# Altium PCB SSFocuser-C-DRV8825.PcbDoc
Units mil, origin at the board's own origin, x right, y up, seen from the top; angles counter-clockwise.
Board outline 3068 x 1575 mil, 2 copper layers (Top Layer, Bottom Layer); 70 components, 74 nets, 311 pads, 240 vias.
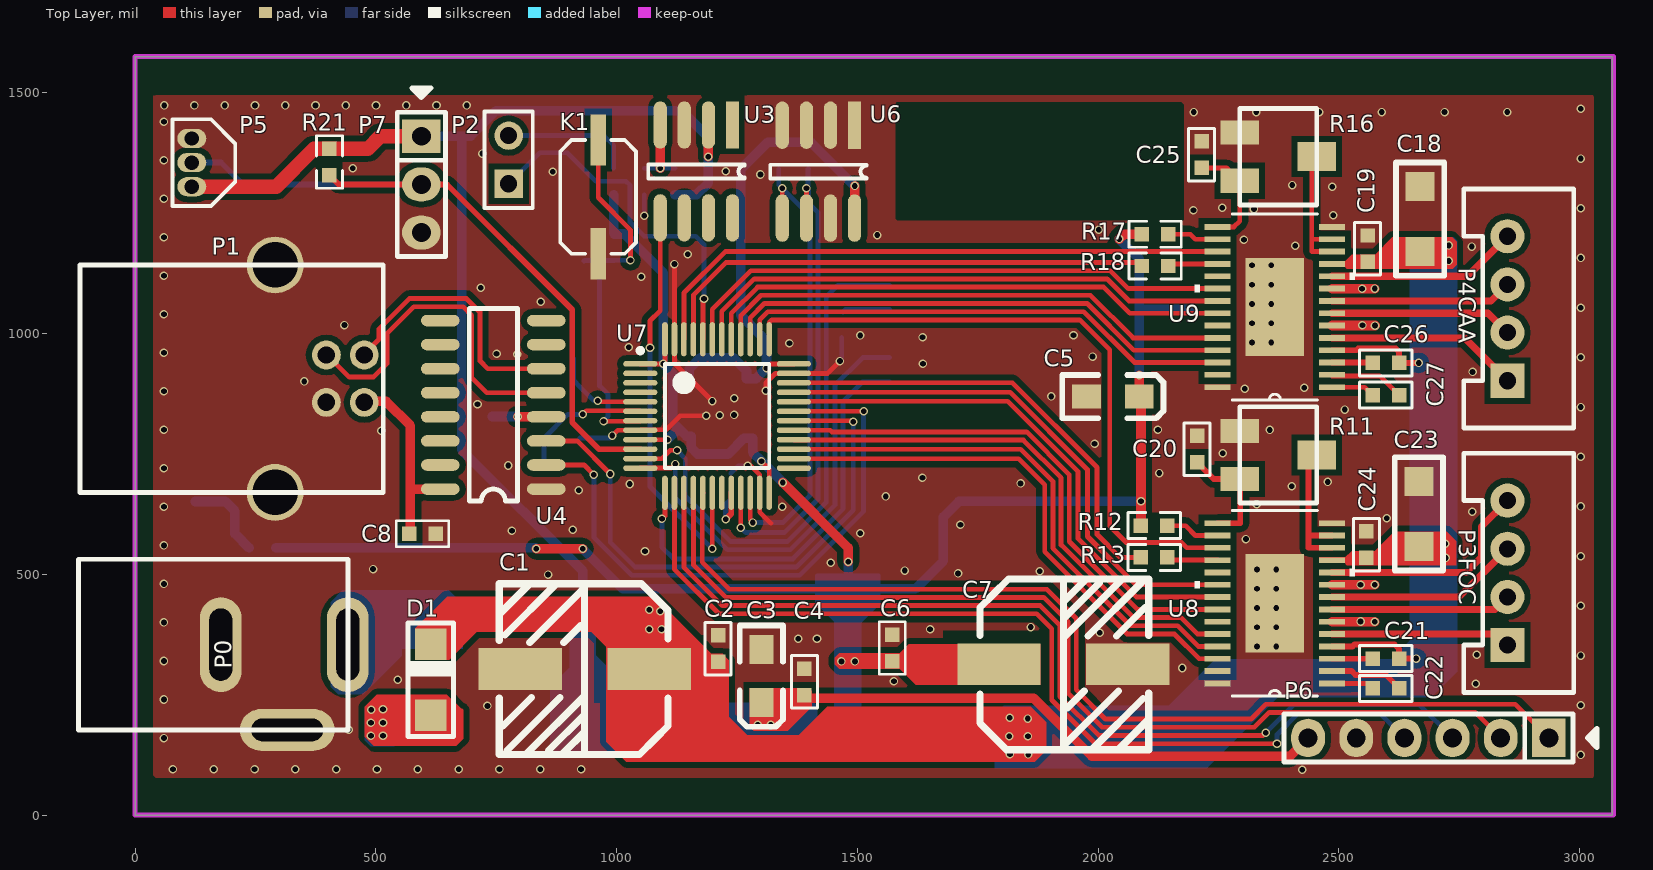
[diagram p0: Top Layer view]
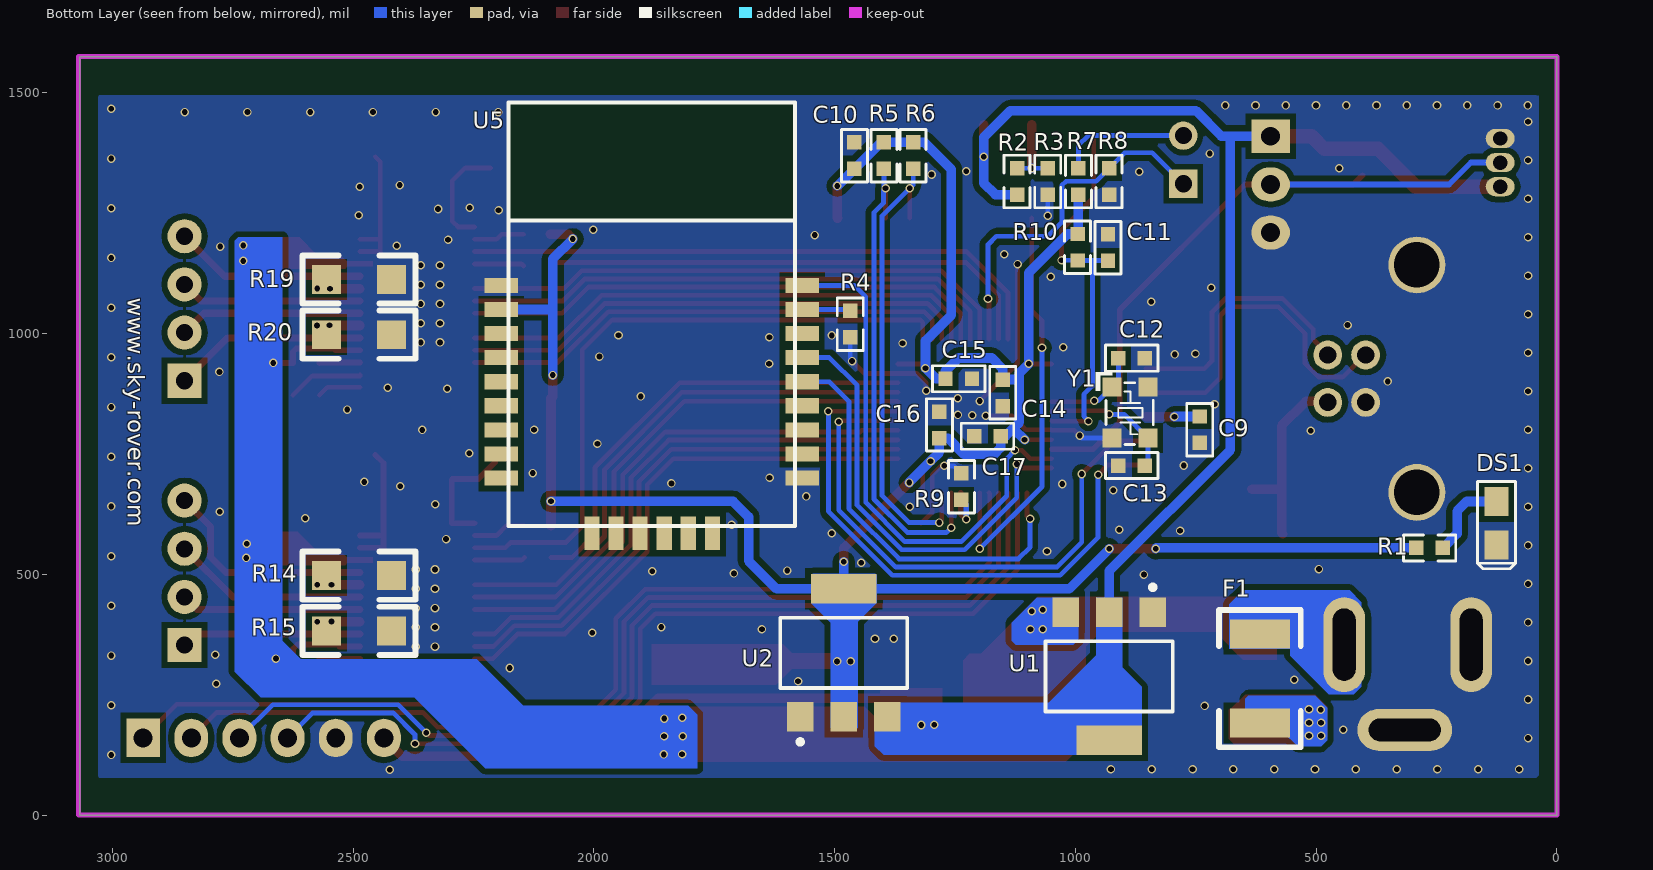
[diagram p1: Bottom Layer view, seen from below]

## Layer stack, top to bottom
Top Solder: solder mask 0.4, Solder Resist, Dk 3.5
Top Layer: signal copper 1.4
Dielectric1: dielectric 12.6, FR-4, Dk 4.8
Bottom Layer: signal copper 1.4
Bottom Solder: solder mask 0.4, Solder Resist, Dk 3.5

## Board outline
0,0 0,1575 3068,1575 3068,0

## Design rules (kind name [scope] priority, off if disabled: settings)
Clearance Clearance_pyog [InPolygon] p1: gap=12
Clearance Clearance_mcu [InComponentClass('U7')] p2: gap=7
Clearance [All] p3: gap=7
HoleSize [All] p1: absolutevalues=TRUE maxlimit=1000 minlimit=1 maxpercent=80.000 minpercent=20.000
MinimumSolderMaskSliver [All] p1: minsoldermaskwidth=0
PolygonConnect [All] p1: connectstyle=Direct reliefconductorwidth=10 reliefentries=4 polygonreliefangle="90 Angle" airgapwidth=10
RoutingVias [All] p1: holewidth=28 width=50 viastyle="Through Hole" minholewidth=11.81 minwidth=17.72 maxholewidth=28 maxwidth=50
SilkToSilkClearance [All] p1: silktosilkclearance=0
SilkToSolderMaskClearance [IsPad] p1: minsilkscreentomaskgap=0 clearancetoexposedcopper=TRUE
SolderMaskExpansion [All] p1: expansion=4
Width [All] p1: maxlimit=50 minlimit=10 preferedwidth=10
25 further rules are at their usual default settings.

## Components (designator, comment, footprint, x,y, rotation, side; value= is the part's Value field where it differs from the comment)
C1 "470uF" 16V/470U(CD10X10D5) 933.68,303.18 r180 top locked
C2 "100nF" 0603C 1211,373 r270 top locked
C3 "10uF" 3216 1300.72,233.54 r270 top locked
C4 "100nF" 0603C 1390,304 r270 top locked
C5 "10uF" 3216 2085.53,868.99 r0 top locked
C6 "100nF" 0603C 1572.6,374.51 r270 top locked
C7 "1000uF" 16V/470U(CD10X10D5) 1928,313 r0 top locked
C8 "100nF" 0603C 624.58,584.24 r180 top
C9 "100nF" 0603C 741.85,772.75 r90 bottom locked
C10 "100nF" 0603C 1459,1397 r270 bottom locked
C11 "100nF" 0603C 932.4,1205.8 r270 bottom locked
C12 "20pF" 0603C 910.66,948.79 r180 bottom locked
C13 "20pF" 0603C 855.66,725.6 r0 bottom locked
C14 "100nF" 0603C 1151,849.42 r90 bottom locked
C15 "100nF" 0603C 1214.8,906.18 r0 bottom locked
C16 "100nF" 0603C 1282.7,837.67 r270 bottom locked
C17 "100nF" 0603C 1210.12,786.77 r180 bottom locked
C18 "4.7uF" 1206C 2668.73,1170.02 r90 top locked
C19 "100nF" 0603C 2559.81,1148.62 r90 top locked
C20 "0.47uF" 0603C 2205.52,787.53 r270 top locked
C21 "100nF" 0603C 2625,325 r180 top locked
C22 "10nF" 0603C 2625,263 r180 top locked
C23 "4.7uF" 1206C 2666,558 r90 top locked
C24 "100nF" 0603C 2557,534 r90 top locked
C25 "0.47uF" 0603C 2215,1399 r270 top locked
C26 "100nF" 0603C 2625,939 r180 top locked
C27 "10nF" 0603C 2625,872 r180 top locked
D1 "M7" DO-214AC 614,281 r90 top locked
DS1 "LED1" 0805D 125.4,606.21 r270 bottom locked
F1 "MSMD350-6V 2A" 1812R 617,191 r90 bottom locked
K1 "Key" SW-4*6 1040.59,1401.9 r270 top locked
P0 "SOURCE" DC_5.5MM -117.06,531.17 r0 top locked
P1 "USB-B" USB-B 476.04,857.01 r0 top locked
P2 "BOOT0" HDR1X2 776,1311 r90 top locked
P3FOC "Header 4" XH_4_V 2850,353 r90 top locked
P4CAA "Header 4" XH_4_V 2850,902 r90 top locked
P5 "DS18B20" TO-92B 118,1305 r90 top
P6 "HDR1x6" PIN-6-2.54-1.0 2686.08,160.17 r180 top locked
P7 "HDR1x3" PIN-3-2.54-1.0 594.58,1309.68 r270 top locked
R1 "102" 0603R 237.11,554.82 r0 bottom
R2 "4.7K" 0603R 1121.29,1343.29 r270 bottom locked
R3 "2K" 0603R 1057.56,1343.29 r270 bottom locked
R4 "10K" 0603R 1467.73,1047.1 r270 bottom locked
R5 "4.7k" 0603R 1397.87,1342.08 r90 bottom locked
R6 "4.7k" 0603R 1337,1342 r90 bottom locked
R7 "5K" 0603R 993.83,1288.29 r90 bottom locked
R8 "10K" 0603R 930.1,1343.29 r270 bottom locked
R9 "10K" 0603R 1236.98,709.56 r270 bottom locked
R10 "10K" 0603R 995.35,1151.73 r90 bottom locked
R11 "RPot" VR_SMD 2374,748 r270 top locked
R12 "1.5K" 0603R 2089,601 r0 top locked
R13 "1.5K" 0603R 2089,535.18 r0 top locked
R14 "0.1Ω" 1206R 2420.42,497.12 r0 bottom locked
R15 "0.1Ω" 1206R 2420.42,382.66 r0 bottom locked
R16 "RPot" VR_SMD 2374,1367.25 r270 top locked
R17 "1.5K" 0603R 2090.78,1206.11 r0 top locked
R18 "1.5K" 0603R 2090.78,1140.25 r0 top locked
R19 "0.1Ω" 1206R 2420.31,1112.11 r0 bottom locked
R20 "0.1Ω" 1206R 2420.31,997.55 r0 bottom locked
R21 "4.7K" 0603R 403.8,1328.78 r90 top locked
U1 "AMS1117-5.0" SOT223 930,288 r0 bottom locked
U2 "AMS1117-3.3" SOT223 1481,337 r180 bottom locked
U3 "MAX813LCSA" SOP-8 1240.73,1433.05 r270 top locked
U4 "CH340G" SO-16 854,677 r180 top locked
U5 "B-0006" B-0006 1880,1040 r180 bottom locked
U6 "AT24C02BN-SH-T" SOP-8 1494.25,1432.68 r270 top locked
U7 "STM32F103C8T6" LQFP48_N 1208.72,828.74 r270 top locked
U8 "DRV8825" HTSSOP 2367,439.84 r180 top locked
U9 "DRV8825" HTSSOP 2367,1054.98 r180 top locked
Y1 "8MHz" X3225 925.35,887.89 r270 bottom locked

## Footprints (in the part's own frame and the unit in brackets; to place one, negate y for a bottom-side part, rotate by r counter-clockwise, add the part's x,y. Pads: shape width x height; smd on the part's side, far side on the other; paste and mask are expansions set on the pad)
16V/470U(CD10X10D5) [mm] "取自《FE-3AD》"
  rect 4.4x2.2 smd: 1(-3.4,0) 2(3.4,0)
  Top Layer pour cut-out: -6.35,1.778 -0.508,1.778 -0.508,-1.778 -6.35,-1.778
  silkscreen extent -4.4,-4.5 4.5,4.5
0603C [mil]
  rect 30x30 smd: 1(0,0) 2(55,0)
  silkscreen extent -27,-27 82,27, body extent -4,-16 58,16, height 12
0603R [mil]
  rect 30x30 smd: 1(0,0) 2(55,0)
  silkscreen extent -27,-27 82,27, body extent -4,-18 58,16, height 18
0805D [mil]
  rect 60x50 smd: 1(-45,0) 2(45,0)
  silkscreen extent -87,-39 95,39, body extent -63,-32 63,30, height 42
1206C [mil]
  rect 60x60 smd: 1(0,0) 2(135,0)
  silkscreen extent -50,-50 185,50, body extent 6,-33 132,29, height 40
1206R [mil]
  rect 60x60 smd: 1(0,0) 2(135,0)
  silkscreen extent -50,-50 185,50, body extent 5,-32 131,30, height 22
1812R [mil]
  rect 60x125 smd: 1(0,0) 2(185,0)
  silkscreen extent -50,-85 235,85, body extent 4,-63 182,63, height 64
3216 [mil]
  rect 60x50 smd: 1(0,0) 2(-110,0)
  silkscreen extent -160,-45 50,45, body extent -151,-35 38,36, height 73
B-0006 [mil]
  rect 70x31.5 smd: 1(-312.5,60) 2(-312.5,10) 3(-312.5,-40) 4(-312.5,-90) 5(-312.5,-140) 6(-312.5,-190) 7(-312.5,-240) 8(-312.5,-290) 9(-312.5,-340) 16(312.5,-340) 17(312.5,-290) 18(312.5,-240) 19(312.5,-190) 20(312.5,-140) 21(312.5,-90) 22(312.5,-40) 23(312.5,10) 24(312.5,60)
  rect 31.5x70 smd: 10(-124.04,-455) 11(-74.04,-455) 12(-24.04,-455) 13(25.96,-455) 14(75.96,-455) 15(125.96,-455)
  Top Layer pour cut-out: -298,439 -298,195 297,195 298,196 298,439
  silkscreen extent -298,-440 298,440
DC_5.5MM [mm]
  oval 2.2x5 hole 1.2 slot 3.8 at 90 deg: 1(14.2,-4.5) 2(7.5,-4.5)
  oval 5x2.2 hole 1.2 slot 3.8 at 0 deg: 3(11,-9)
  silkscreen extent 0,-9 14.2,0, body extent -0.1,-8.88 14.1,-0.12, height 10.82
DO-214AC [mm]
  rect 1.655x1.67 smd: 1(1.865,0) 2(-1.865,0)
  silkscreen extent -3,-1.2 3,1.2, body extent -2.74,-1.4 2.74,1.4, height 2.3
HDR1X2 [mm] "Connector; Header; 2 Position"
  rect 1.5x1.5 hole 0.9: 1(0,0)
  round 1.5 hole 0.9: 2(2.54,0)
  silkscreen extent -1.27,-1.27 3.81,1.27, body extent -1.27,-1.27 3.81,1.27, height 7.58
HTSSOP [mil]
  rect 54x12 smd: 1(-119,166.34) 2(-119,140.75) 3(-119,115.16) 4(-119,89.57) 5(-119,63.98) 6(-119,38.39) 7(-119,12.8) 8(-119,-12.8) 9(-119,-38.39) 10(-119,-63.98) 11(-119,-89.57) 12(-119,-115.16) 13(-119,-140.75) 14(-119,-166.34) 15(119,-166.34) 16(119,-140.75) 17(119,-115.16) 18(119,-89.57) 19(119,-63.98) 20(119,-38.39) 21(119,-12.8) 22(119,12.8) 23(119,38.39) 24(119,63.98) 25(119,89.57) 26(119,115.16) 27(119,140.75) 28(119,166.34)
  rect 122.05x203.94 smd: 29(0,0)
  silkscreen extent -166,-193 166,193, body extent -133,-191 120,191, height 40
LQFP48_N [mm]
  oval 0.3x1.8 smd: 1(-2.75,-4.05) 2(-2.25,-4.05) 3(-1.75,-4.05) 4(-1.25,-4.05) 5(-0.75,-4.05) 6(-0.25,-4.05) 7(0.25,-4.05) 8(0.75,-4.05) 9(1.25,-4.05) 10(1.75,-4.05) 11(2.25,-4.05) 12(2.75,-4.05) 25(2.75,4.05) 26(2.25,4.05) 27(1.75,4.05) 28(1.25,4.05) 29(0.75,4.05) 30(0.25,4.05) 31(-0.25,4.05) 32(-0.75,4.05) 33(-1.25,4.05) 34(-1.75,4.05) 35(-2.25,4.05) 36(-2.75,4.05)
  oval 1.8x0.3 smd: 13(4.05,-2.75) 14(4.05,-2.25) 15(4.05,-1.75) 16(4.05,-1.25) 17(4.05,-0.75) 18(4.05,-0.25) 19(4.05,0.25) 20(4.05,0.75) 21(4.05,1.25) 22(4.05,1.75) 23(4.05,2.25) 24(4.05,2.75) 37(-4.05,2.75) 38(-4.05,2.25) 39(-4.05,1.75) 40(-4.05,1.25) 41(-4.05,0.75) 42(-4.05,0.25) 43(-4.05,-0.25) 44(-4.05,-0.75) 45(-4.05,-1.25) 46(-4.05,-1.75) 47(-4.05,-2.25) 48(-4.05,-2.75)
  silkscreen extent -3.57,-4.17 2.75,2.75, body extent -4.5,-4.5 4.5,4.5, height 1.5
PIN-3-2.54-1.0 [mil] "Pin Header"
  rect 70x80 hole 39.37: 1(-100,0)
  oval 70x80 hole 39.37: 2(0,0) 3(100,0)
  silkscreen extent -200,-50 150,50, body extent -150,-50 150,50, height 398
PIN-6-2.54-1.0 [mil] "Pin Header"
  rect 70x80 hole 39.37: 1(-250,0)
  oval 70x80 hole 39.37: 2(-150,0) 3(-50,0) 4(50,0) 5(150,0) 6(250,0)
  silkscreen extent -350,-50 300,50, body extent -300,-50 300,50, height 398
SO-16 [mil]
  oval 80x24 smd: 1(0,0) 2(0,-50) 3(0,-100) 4(0,-150) 5(0,-200) 6(0,-250) 7(0,-300) 8(0,-350) 9(220,-350) 10(220,-300) 11(220,-250) 12(220,-200) 13(220,-150) 14(220,-100) 15(220,-50) 16(220,0)
  silkscreen extent 60,-375 160,25, body extent -12,-377 226,29, height 77
SOP-8 [mm]
  rect 2.5x0.7 smd: 1(0,0)
  oval 2.5x0.7 smd: 2(0,-1.27) 3(0,-2.54) 4(0,-3.81) 5(4.9,-3.81) 6(4.9,-2.54) 7(4.9,-1.27) 8(4.9,0)
  silkscreen extent 2.08,-4.44 2.82,0.64, body extent -0.56,-4.44 5.48,0.58, height 1.6
SOT223 [mm] "SOT-223/SC-73; 4 Leads; Body 6.7 x 7.3 mm, inc. leads (LxW max)"
  rect 1.4x1.55 smd: 1(-2.3,-3.375) 2(0,-3.375) 3(2.3,-3.375)
  rect 3.45x1.55 smd: 4(0,3.375)
  silkscreen extent -3.35,-4.82 3.35,1.85, body extent -3.25,-3.53 3.25,3.43, height 1.7
SW-4*6 [mm] "SWITCH"
  rect 2.7x0.8 smd: 1(0,-2) 2(6,-2)
  silkscreen extent 0,-4 6,0
TO-92B [mil]
  oval 40x60 hole 30: 1(0,0) 2(50,0) 3(100,0)
  silkscreen extent -40,-90 140,40
USB-B [mm]
  round 1.524 hole 0.92: 1(0,0) 2(0,2.5) 3(-2,2.5) 4(-2,0)
  round 3 hole 2.4: 5(-4.7,7.25) 6(-4.7,-4.75)
  silkscreen extent -15,-4.75 1,7.25
VR_SMD [mil]
  rect 50x80 smd: 1(-50,-80) 2(50,-80)
  rect 60x80 smd: 3(0,80)
  silkscreen extent -100,-80 100,80
X3225 [mil]
  rect 39.37x39.37 smd: 1(-1,1) 2(105,1) 3(105,76) 4(-1,76)
  silkscreen extent -32,-33 118,87, body extent -9,-11 117,87, height 28
XH_4_V [mm]
  rect 1.8x1.8 hole 0.9: 1(0,0)
  round 1.8 hole 0.9: 2(2.54,0) 3(5.08,0) 4(7.62,0)
  silkscreen extent -2.5,-3.5 10.12,2.3, body extent -2.39,-3.35 10.01,2.75, height 7

## Part data
C1: library part C470UF016S, "470UF      16V      CD10X10D5"
C2 C4 C6 C8 C10 C11 C12 C13 C14 C15 C16 C17 C18 C19 C20 C21 C22 C23 C24 C25 C26 C27: library part Cap, "Capacitor"
C3 C5 C7: library part CAP2
C9: library part C
D1: library part Diode, "High Conductance Fast Diode"
DS1: library part LED2, "Typical RED, GREEN, YELLOW, AMBER GaAs LED"
F1: library part FUSE2, "Fuse"
K1: library part KEY2, "Switch"
P2: library part MHDR1X2, "Header, 2-Pin"
P3FOC P4CAA: "Header, 4-Pin"
P5: library part "Header 3", "Header, 3-Pin"
P6 P7: "Connector"
R1 R2 R3 R5 R6 R8 R10 R14 R15 R19 R20 R21: library part RES, "Resistor"
R4 R7 R9 R12 R13 R17 R18: library part R
R11 R16: "Potentiometer"
U1 U2: library part AMS1117
U3: library part MAX813L
U4: "USB2UART"
U6: library part 24C256
U7: "STM32 ARM-based 32-bit MCU Performance Line with 64 kB Flash, 20 kB Internal RAM, -40 to +85癈 Temperature, 48-Pin LQFP, Tray"
Y1: library part XTAL_1, "Crystal Oscillator"

## Via types
v1: diameter 17.72, hole 11.81, Top Layer to Bottom Layer, 240 vias

## Nets (pads, with @x,y where several pads share a name; then routed paths per layer and width w, separated by ;. In a path a pad name is that pad's centre, name@x,y a point inside that pad or via, vN(x,y) a via of type N, cw(c..) or ccw(c..) an arc to the next point about the centre after c; other vN are vias at no path point)
A1: P3FOC.1 U8.5 | length 373.5
  Top Layer w15: U8.5 2827.14,375.86 P3FOC.1
A2: P3FOC.2 U8.7 | length 374.8
  Top Layer w15: U8.7 2824.05,427.05 P3FOC.2
A12: P4CAA.1 U9.5 | length 400.9
  Top Layer w15: U9.5 2761,991 P4CAA.1
A22: P4CAA.2 U9.7 | length 380.6
  Top Layer w15: U9.7 2809.82,1042.18 P4CAA.2
B1: P3FOC.4 U8.10 | length 462.8
  Top Layer w15: U8.10 2764.02,503.82 2796.38,536.18 2796.38,599.38 P3FOC.4
B2: P3FOC.3 U8.8 | length 405.6
  Top Layer w15: U8.8 2749.64,452.64 P3FOC.3
B12: P4CAA.4 U9.10 | length 398.4
  Top Layer w15: U9.10 2766.95,1118.95 P4CAA.4
B22: P4CAA.3 U9.8 | length 378.2
  Top Layer w15: U9.8 2815.77,1067.77 P4CAA.3
BOOT0: P2.1 R8.1 U7.44 | length 753.7
  Top Layer w10: U7.44 1179.19,1070 v1(1181.59,1072.4)
  Bottom Layer w10: P2.1 840.55,1375.55 897.83,1375.55 R8.1 957.1,1316.29 1019.49,1316.29 1027.98,1307.79 1027.98,1231.25 1057.28,1201.96 1164.34,1201.96 1181.59,1184.71 v1(1181.59,1072.4)
BOOT1: R9.2 U7.20 | length 103.9
  Top Layer w12: v1(1226.83,614.45) 1238.25,625.87 U7.20
  Bottom Layer w12: v1(1226.83,614.45) 1226.83,644.41 R9.2
BRST: U5.24 U7.11 | length 1119.8
  Top Layer w10: U7.11 1093.81,740.16 1111.18,757.52 v1(1125.59,757.52)
  Bottom Layer w10: v1(1125.59,757.52) 1142.73,740.39 1142.73,720.39 1142.68,720.35 1142.68,662.59 1237.31,567.96 1354.01,567.96 1435.44,649.39 1435.44,1075.97 1459.47,1100 U5.24
BRX: U5.21 U7.12 | length 947.5
  Top Layer w10: U7.12 1113.31,720.47 v1(1121.87,729.03)
  Bottom Layer w10: v1(1121.87,729.03) 1121.87,659.36 1230.27,550.96 1361.05,550.96 1453.56,643.47 1453.56,892.42 1511.14,950 U5.21
BTX: U5.20 U7.13 | length 882.1
  Top Layer w10: v1(1094.3,615.25) 1100.45,621.41 U7.13
  Bottom Layer w10: v1(1094.3,615.25) 1094.3,556.07 1118.37,532 1366.13,532 1470.56,636.43 1470.56,859.57 1510.99,900 U5.20
D1: P6.4 U7.14 | length 1970.7
  Top Layer w10: U7.14 1120.14,510.76 1212.73,418.16 1872.69,418.16 1903.74,387.12 1903.74,238.95 1994.63,148.06 v1(2371.49,148.06)
  Bottom Layer w10: v1(2371.49,148.06) 2371.49,167.05 2416.62,212.17 2584.08,212.17 P6.4
D2: P6.3 U7.15 | length 2037.4
  Top Layer w10: U7.15 1139.82,515.11 1219.77,435.16 1879.74,435.16 1920.74,394.16 1920.74,246 2001.18,165.55 2014.33,165.55 2014.83,165.06 2015.32,165.55 2342.69,165.55 v1(2348.06,170.92)
  Bottom Layer w10: v1(2348.06,170.92) 2406.31,229.17 2667.08,229.17 P6.3
D3: P6.2 U7.16 | length 2087.4
  Top Layer w10: U7.16 1159.51,519.47 1226.82,452.16 1886.78,452.16 1937.74,401.2 1937.74,253.04 2008.22,182.55 2324.67,182.55 2355.26,213.14 2783.11,213.14 P6.2
D3V3: C5.1 C6.2 C7.1 C10.2 C14.2 C15.2 C16.2 C17.2 R1.2 R5.2 R6.2 R7.1 R10.2 R12.1 R17.1 U2.2 U2.4 U5.2 U6.8 U7.1 U7.9 U7.24 U7.36 U7.48 | length 5272.2
  Top Layer w10: U7.9 v1(1105.61,779.53) ; U7.1 v1(1097.16,937.01) 1100.45,940.3 U7.48 ; v1(1300.84,735.05) 1316.99,718.9 U7.24 ; v1(1311.44,928.15) 1320.3,937.01 U7.36
  Top Layer w20: v1(833.39,552.98) v1(929.78,552.98) ; v1(1345.32,690.57) 1481.14,554.75 v1(1481.14,526.36) ; U6.8 1494.45,1239.96 v1(1494.45,1306.55) ; v1(2043.76,1196.43) 2053.44,1206.11 R17.1 ; v1(2085.53,913.72) C5.1 2089,865.52 R12.1
  Bottom Layer w10: 1127.26,801.17 1127.26,804.47
  Bottom Layer w20: R1.2 831.54,554.82 v1(833.39,552.98) ; v1(929.78,552.98) 1012.88,469.87 U2.4 ; R7.1 993.83,1208.25 R10.2 1016.14,1206.73 1097.16,1125.71 v1(1097.16,937.01) 1116.32,917.84 1116.32,904.42 ; v1(1105.61,779.53) 1127.26,801.17 ; v1(1345.32,690.57) v1(1300.84,735.05) 1282.7,753.19 C16.2 1264.77,782.67 1232,749.91 1168.17,749.91 1155.12,762.96 C17.2 1144.95,786.77 1127.26,804.47 1116.32,815.4 1116.32,904.42 ; v1(1481.14,526.36) 1481.14,470.01 U2.4 ; v1(1494.45,1306.55) C10.2 1403.92,1397.08 R5.2 1397.78,1397 R6.2 1313.64,1397 1257.55,1340.91 1257.55,1038.6 1311.44,984.7 v1(1311.44,928.15) 1289.47,906.18 C15.2 1269.8,922.61 1243.3,949.12 1173.61,949.12 1151,926.5 C14.2 1116.32,904.42 ; v1(2043.76,1196.43) 2085.53,1154.66 2085.53,1047.45 ; v1(2085.53,913.72) 2085.53,1047.45 ; v1(2089.07,651.6) 1710.84,651.6 1678.6,619.36 1678.6,528.09 1620.39,469.87 U2.4 ; U5.2 2088.08,1050 2085.53,1047.45
  other v1: 1467,319 1495,319
D4: P6.1 U7.17 | length 2166.1
  Top Layer w10: U7.17 1178.02,668.12 1178.02,525 1233.86,469.16 1893.82,469.16 1954.74,408.24 1954.74,260.08 2015.26,199.55 2317.63,199.55 2348.22,230.14 2866.11,230.14 P6.1
D5V0: C3.1 C4.2 P5.1 P6.6 P7.1 R2.2 R21.2 U1.2 U1.4 U2.3 U3.2 | length 3630.8
  Top Layer w20: v1(1190.73,1367.38) U3.2 ; 1365.03,242.39 1866.64,242.39 1986.83,122.2 2398.11,122.2 P6.6
  Top Layer w30: P5.1 292.93,1305 371.71,1383.78 R21.2 483.71,1383.78 509.62,1409.68 P7.1
  Bottom Layer w20: P7.1 678.42,1409.68 ; U1.2 930,506.77 678.42,758.35 678.42,1409.68 ; R2.2 1166.45,1288.29 1190.73,1312.56 v1(1190.73,1367.38) 1190.73,1407.46 1135.16,1463.03 749.97,1463.03 696.62,1409.68 678.42,1409.68
  other v1: 1320.49,187.08 1293.35,187.65
D12V0: C1.1 C2.2 C18.1 C19.1 C21.1 C23.1 C24.1 C26.1 D1.1 U1.3 U8.4 U8.11 U9.4 U9.11 | length 407.3
  Top Layer w12: U8.4 2528.15,350.27 2532.17,354.3 2615.54,354.3 2625,344.83 C21.1 v1(2660.33,325) ; U9.4 2536.86,965.41 2540.46,969.01 2618.32,969.01 2625,962.33 C26.1 v1(2665.93,939)
  other v1: 1817,126 1854.74,125.96 1815.8,163.86 1854.34,163.86 1854.18,200.45 1816.38,202.19 1068.01,385.62 1093.39,386.1 1091,423 1068.01,426.47 2722,534 2720.95,563.5 2728.2,1150.7 2728.2,1183.01
DIR: U7.33 U8.20 | length 1126.8
  Top Layer w10: U7.33 1817.59,877.95 1978,717.54 1978,578.52 2078.29,478.23 U8.20
DIR2: U7.43 U9.20 | length 1159.8
  Top Layer w10: U7.43 1198.88,1050.4 1278.88,1130.4 2025.53,1130.4 2062.57,1093.36 U9.20
EN: U7.32 U8.21 | length 1130.3
  Top Layer w10: U7.32 1369.34,859.44 1812.06,859.44 1958.32,713.18 1958.32,574.16 2079.84,452.64 U8.21
EN2: U7.42 U9.21 | length 1134.1
  Top Layer w10: U7.42 1218.56,1046.05 1285.92,1113.4 2018.49,1113.4 2064.12,1067.77 U9.21
FLT: R13.1 U7.34 | length 952.4
  Top Layer w10: U7.34 1821.95,897.64 1997.69,721.9 1997.69,582.87 2045.38,535.18 R13.1
FLT2: R18.1 U7.45 | length 1053.9
  Top Layer w10: U7.45 1159.51,1079.81 1227.1,1147.4 2083.63,1147.4 R18.1
GND: C1.2 C2.1 C3.2 C4.1 C5.2 C6.1 C7.2 C8.1 C9.1 C10.1 C11.1 C12.2 C13.2 C14.1 C15.1 C16.1 C17.1 C18.2 C19.2 C20.1 C23.2 C24.2 C25.1 DS1.2 K1.2 P0.2 P0.3 P1.4 P1.5 P1.6 P5.3 P6.5 P7.3 R3.2 R4.2 R8.2 R9.1 R11.1 R14.1 R15.1 R16.1 R19.1 R20.1 U1.1 U2.1 U3.3 U4.1 U5.1 U5.16 U6.1 U6.2 U6.3 U6.4 U6.7 U7.8 U7.23 U7.35 U7.47 U8.14 U8.28 U8.29 U9.14 U9.28 U9.29 Y1.2 Y1.4 | length 1066.2
  Top Layer w10: v1(991.37,788.15) 1002.43,799.21 U7.8 1050.44,800.38 1102.98,800.38 1132.06,829.46 v1(1186.43,829.46) ; v1(1120.14,1144.28) U7.47 1120.14,938.5 v1(1198.79,859.85) ; v1(1272.53,725.24) 1278.75,725.24 1297.3,706.69 U7.23 1297.3,629.29 1320.47,606.12 ; v1(1310.06,881.26) 1310.06,897.27 1330.12,917.32 U7.35 1438.33,917.32 v1(1463.83,942.83)
  Bottom Layer w10: Y1.2 986.11,782.89 v1(991.37,788.15) ; v1(1057.56,1244.72) R3.2 ; R9.1 1252.67,725.24 v1(1272.53,725.24) ; v1(1463.83,942.83) 1467.73,946.73 R4.2
  other v1: 2423.66,94.37 78.73,95 163.48,95 248.23,95 332.98,95 417.73,95 502.48,95 587.24,95 671.99,95 756.74,95 841.49,95 926.24,95 3002.53,124.81 60,160 443.73,177.16 731.87,226.65 3002.53,228.02 60,240 2784.44,272.77 1575.99,277.61 545.32,281.18 2174.88,305.42 60,320 3002.53,331.23 2786.46,332.74 2330,350 2370,350 1377.33,366.08 1416.26,366.08 2003.16,378.92 1650.98,385.97 1860.27,390.46 2330,390 2370,390 60,400 2330,430 2370,430 3002.53,434.44 2330,470 2370,470 60,480 857.72,499.56 1709.15,501.85 1878.89,506.44 1598.18,507.85 2330,510 2370,510 494.27,510.92 1444.99,524.2 3002.53,537.65 1059.03,547.58 60,560 2307,573.26 1506.33,585.34 782.73,590.19 909.02,592.21 1714.14,602.92 2599.69,616.1 2777.04,629.6 60,640 1344.34,640.12 3002.53,640.86 2329.23,645.54 1558.95,661.68 921.49,674.76 2401.88,682.66 1027.64,687.51 1838.93,688.63 2476.73,691.85 1635.24,700.22 2126.76,710.29 60,720 775.25,725.98 3002.53,744.07 2258.81,751.54 1992.63,771.45 511.47,797.9 60,800 2124.32,799.99 2356.66,799.72 1214,830 1244,831 2512.19,842.22 3002.53,847.28 711.23,853.35 1244.38,865.5 1902.57,869.39 60,880 2304.77,885.34 2428.2,887.19 351.38,900.47 2777.63,920.29 1636.29,937.08 3002.53,950.49 1988.4,952.27 793.98,956.56 750.77,957.78 60,960 1025.01,971.75 1359.05,979.61 2319.6,981.51 2359.6,981.51 1635.41,992.14 1505.77,996.1 1948.94,996.67 434.95,1017.68 2319.6,1021.51 2359.6,1021.51 60,1040 3002.53,1053.7 2319.6,1061.51 2359.6,1061.51 842.5,1066.23 717.74,1094.77 2319.6,1101.51 2359.6,1101.51 1051.33,1118.16 60,1120 2319.6,1141.51 2359.6,1141.51 3002.53,1156.91 1148.07,1164.49 2776.24,1180.68 2409.66,1182.6 2302.92,1194.83 60,1200 1541.46,1204.45 2001.35,1215.52 2488.39,1245.61 2198.01,1255.73 2323.68,1258.65 3002.53,1260.12 2257.94,1261.03 60,1280 2486.35,1305.13 2403.18,1308.39 1298.77,1330.26 867.46,1336.23 1226.58,1337.16 452.28,1343.22 60,1360 3002.53,1363.33 720.92,1373.72 60,1440 2198.34,1460 2328.62,1460 2458.89,1460 2589.17,1460 2719.45,1460 2849.72,1460 3002.53,1466.54 60.67,1473.63 123.49,1473.63 186.31,1473.63 249.14,1473.63 311.96,1473.63 374.78,1473.63 437.61,1473.63 500.43,1473.63 563.26,1473.63 626.08,1473.63 688.9,1473.63
M0: U7.28 U8.24 | length 1128.5
  Top Layer w10: U7.28 1369.05,778.65 1844.77,778.65 1923.27,700.14 1923.27,561.12 2074.37,410.02 2172.49,410.02 2206.64,375.86 U8.24
M1: U7.27 U8.25 | length 1130.9
  Top Layer w10: U7.27 1839.54,759.84 1906.27,693.1 1906.27,554.08 2067.33,393.02 2165.45,393.02 2208.19,350.27 U8.25
M02: U7.40 U9.24 | length 1093.3
  Top Layer w10: U7.40 1257.93,1037.33 1300,1079.4 1984.15,1079.4 2072.55,991 U9.24
M2: U7.26 U8.26 | length 1133.4
  Top Layer w10: U7.26 1835.18,740.16 1889.27,686.06 1889.27,547.04 2060.29,376.02 2158.4,376.02 2209.74,324.68 U8.26
M12: U7.39 U9.25 | length 1067.5
  Top Layer w10: U7.39 1277.62,1032.98 1307.04,1062.4 1977.11,1062.4 2074.1,965.41 U9.25
M22: U7.38 U9.26 | length 1041.8
  Top Layer w10: U7.38 1297.3,1028.62 1314.08,1045.4 1970.07,1045.4 2075.65,939.82 U9.26
NetC9_2: C9.2 U4.4 | length 112.5
  Top Layer w20: v1(794.45,827) U4.4
  Bottom Layer w20: C9.2 793.7,827.75 v1(794.45,827)
NetC21_2: C21.2 U8.3 | length 84.8
  Top Layer w12: U8.3 2567.99,324.68 C21.2@2569.99,326.68
NetC22_1: C22.1 U8.2 | length 153.5
  Top Layer w12: U8.2 2526.51,299.09 2534.6,291 2597.97,291 C22.1@2624.99,263.97
NetC22_2: C22.2 U8.1 | length 87.9
  Top Layer w10: U8.1 2486.5,273 2560.97,273 C22.2@2569.99,263.97
NetC26_2: C26.2 U9.3 | length 84.3
  Top Layer w12: U9.3 2569.18,939.82 C26.2
NetC27_1: C27.1 U9.2 | length 157.8
  Top Layer w10: U9.2 2486,912 2585,912 C27.1
NetC27_2: C27.2 U9.1 | length 90.9
  Top Layer w10: U9.1 2553.36,888.64 C27.2
NetD1_1: D1.2 F1.1
  other v1: 490,165 515,165 490,192 515,192 490.4,219.02 515,220
NetDS1_1: DS1.1 R1.1 | length 179
  Bottom Layer w20: DS1.1 187.46,651.21 207.42,631.25 207.42,584.51 R1.1
NetF1_2: F1.2 P0.1
NetP1_2: P1.2 U4.6 | length 558.1
  Top Layer w10: P1.2@476,957.42 506.21,987.64 506.21,1009.14 569.68,1072.61 688.37,1072.61 716.44,1044.54 716.44,943.07 732.51,927 U4.6
NetP1_3: P1.3 U4.5 | length 723.2
  Top Layer w10: P1.3@397.26,957.42 445.18,909.51 495.08,909.51 523.21,937.63 523.21,999.73 579.09,1055.61 681.33,1055.61 699.44,1037.5 699.44,908.25 730.69,877 U4.5
NetP2_2: P2.2 R7.2 | length 273.7
  Bottom Layer w10: P2.2 973.71,1411 993.83,1390.88 R7.2
NetR2_1: R2.1 R3.1 U3.4 | length 153.7
  Top Layer w20: v1(1090.73,1343.17) U3.4
  Bottom Layer w10: R3.1 v1@1090.51,1343.29 ; v1@1090.73,1343.29 R2.1
  Bottom Layer w20: v1@1090.51,1342.96 v1(1090.73,1343.17)
NetR4_1: R4.1 U5.23 | length 99.5
  Bottom Layer w10: R4.1@1470.22,1044.52 1475.7,1050 U5.23
NetR11_3: R11.3 U8.12 U8.13 | length 298.3
  Top Layer w12: R11.3 2437.1,731.1 2437.1,581.92 ; U8.12 2437.1,555 2437.1,581.92 ; U8.13 2438.43,580.59 2437.1,581.92
NetR13_2: R13.2 U8.18 | length 106.4
  Top Layer w10: R13.2 2149.77,529.41 U8.18
NetR14_2: R14.2 U8.9 | length 88.2
  Top Layer w20: U8.9 v1(2574.23,478.23)
  other v1: 2545,478
NetR15_2: R15.2 U8.6 | length 88.5
  Top Layer w20: U8.6 v1(2574.45,401.45)
  other v1: 2545,402
NetR16_3: R16.3 U9.12 U9.13 | length 285.7
  Top Layer w10: R16.3 2443.87,1357.12 2443.87,1195.45 ; U9.12 2443.87,1170.14 2443.87,1195.45 ; U9.13 2444.15,1195.73 2443.87,1195.45
NetR18_2: R18.2 U9.18 | length 104
  Top Layer w10: R18.2 2150.08,1144.55 U9.18
NetR19_2: R19.2 U9.9 | length 88.6
  Top Layer w20: U9.9 v1(2574.64,1093.36)
  other v1: 2548.08,1092.99
NetR20_2: R20.2 U9.6 | length 89
  Top Layer w20: U9.6 v1(2575.01,1016.59)
  other v1: 2549,1017
OSC_IN: C12.1 U7.5 Y1.1 | length 203.2
  Top Layer w10: v1(960.87,860.49) 963.1,858.27 U7.5
  Bottom Layer w10: C12.1 910.66,902.58 Y1.1 952.75,860.49 v1(960.87,860.49)
OSC_OUT: C13.1 U7.6 Y1.3 | length 283.8
  Top Layer w10: v1(929.79,832.07) 937.35,839.64 1048.22,839.64 U7.6
  Bottom Layer w10: C13.1 849.35,731.92 Y1.3 898.53,832.07 v1(929.79,832.07)
PFO: U3.5 U7.18 | length 866.1
  Top Layer w10: v1(1069.47,970.39) 1069.47,1026.42 1090.73,1047.68 U3.5 ; v1(1198.88,552.86) U7.18
  Bottom Layer w10: v1(1069.47,970.39) 1069.47,682.26 v1(1198.88,552.86)
RESET: C11.2 K1.1 R10.1 U7.7 | length 797.4
  Top Layer w10: K1.1 961.85,1282.52 1028.81,1215.56 v1(1028.81,1152.07) ; v1(973,818) 1048.37,818 U7.7
  Bottom Layer w10: C11.2 933.33,1151.73 964.34,1151.73 ; v1(973,818) 972.19,818 982.42,828.23 982.42,873.6 964.71,891.32 964.71,1151.36 964.34,1151.73 ; v1(1028.81,1152.07) 995.68,1152.07 R10.1 964.34,1151.73
RST: R12.2 U8.16 | length 112.5
  Top Layer w10: R12.2 2181.65,601 2202.05,580.59 U8.16
RST2: R17.2 U9.16 | length 106.5
  Top Layer w10: R17.2 2191.66,1206.11 2202.04,1195.73 U9.16
RXD: U4.3 U7.30 | length 1185.3
  Top Layer w10: U4.3 918.15,777 v1(986.86,708.29) ; U7.30 1489.02,818.9 v1(1491.42,816.5)
  Bottom Layer w10: v1(986.86,708.29) 986.86,566.75 1038.62,515 1373.17,515 1491.42,633.25 v1(1491.42,816.5)
SCL: R5.1 U6.6 U7.21 | length 1026.1
  Top Layer w10: v1(1257.93,596.94) U7.21 ; U6.6 v1(1394.25,1301.81)
  Bottom Layer w10: v1(1257.93,596.94) 1268.28,586.59 1348.59,586.59 1418.44,656.44 1418.44,1251.28 1398.46,1271.27 1398.46,1297.6 v1(1394.25,1301.81) 1397.87,1305.42 R5.1 R5.1@1398.46,1341.49
SDA: R6.1 U6.5 U7.22 | length 972.6
  Top Layer w10: U7.22 1277.62,612.84 v1(1283,607.45) ; U6.5 v1(1344.25,1301.43)
  Bottom Layer w10: v1(1283,607.45) 1345.41,607.45 1401.44,663.48 1401.44,1244.24 v1(1344.25,1301.43) 1337,1308.68 R6.1
SLP: U7.37 U8.17 | length 1378.4
  Top Layer w10: U7.37 1316.99,1022.95 1322.44,1028.4 1961.72,1028.4 2024.05,966.07 2024.05,600.3 2058.26,566.08 2172.98,566.08 2184.06,555 U8.17
SLP2: U7.46 U9.17 | length 1239.8
  Top Layer w10: U7.46 1139.82,1084.17 1225.79,1170.14 U9.17
STEP: U7.29 U8.22 | length 1115.4
  Top Layer w10: U7.29 1443.94,799.21 1447.5,795.65 1851.81,795.65 1940.27,707.19 1940.27,568.16 2081.39,427.05 U8.22
STEP2: U7.41 U9.22 | length 1108.4
  Top Layer w10: U7.41 1238.25,1041.69 1292.96,1096.4 2011.45,1096.4 2065.67,1042.18 U9.22
TEMP: P5.2 P7.2 R21.1 U7.10 | length 1513.6
  Top Layer w12: R21.1 422.89,1309.68 P7.2 647.84,1309.68 907.93,1049.59 907.93,815.45 963.54,759.84 U7.10
  Bottom Layer w12: P5.2 178.7,1355 224.02,1309.68 P7.2
TXD: U4.2 U7.31 | length 1237.9
  Top Layer w10: U4.2 932.85,727 v1(952.84,707.01) ; U7.31 v1(1513.1,838.58)
  Bottom Layer w10: v1(952.84,707.01) 952.84,576.74 1031.58,498 1380.21,498 1513.1,630.88 v1(1513.1,838.58)
VBUS: C8.2 P1.1 U4.16 | length 404.3
  Top Layer w20: P1.1@476,859 521.59,859 571.7,808.88 571.7,677 ; C8.2 571.7,586.37 571.7,677 ; U4.16 571.7,677
VOUT1: C20.2 R11.2 U8.15 | length 242.3
  Top Layer w12: C20.2 2240.05,698 R11.2 2295.23,696.77 2295.23,606.18 U8.15
VOUT2: C25.2 R16.2 U9.15 | length 225
  Top Layer w10: C25.2 2267.25,1344 R16.2 2294,1233.35 2281.97,1221.32 U9.15
pads on no net: U3.1 U3.6 U3.7 U3.8 U4.7 U4.8 U4.9 U4.10 U4.11 U4.12 U4.13 U4.14 U4.15 U5.3 U5.4 U5.5 U5.6 U5.7 U5.8 U5.9 U5.10 U5.11 U5.12 U5.13 U5.14 U5.15 U5.17 U5.18 U5.19 U5.22 U7.2 U7.3 U7.4 U7.19 U7.25 U8.19 U8.23 U8.27 U9.19 U9.23 U9.27

## Polygon pours and split planes (outlines as drawn)
GND on Bottom Layer "Top Layer-No Net" (solid, remove dead copper, pour order 4): 38.23,1494.17 38.23,78.77 39,78 3027.21,78 3029.6,80.4 3029.6,1492.2 3026.78,1495.03 39.1,1495.03 38.2,1494.13
GND on Top Layer "Top Layer-No Net" (solid, remove dead copper, pour order 6): 38.23,1494.17 38.23,78.77 39,78 3027.21,78 3029.6,80.4 3029.6,1492.2 3026.78,1495.03 39.1,1495.03 38.2,1494.13

## Keep-outs
Keep-Out Layer:
  lines w10: 0,0 0,1575 3070,1575 3070,0 0,0

## Other copper
Top Layer:
  region net NetD1_1: 676.61,221.53 647.87,250.26 502.07,250.26 477.06,225.25 477.06,162.46 495.68,143.84 667.03,143.84 681.39,158.21 681.39,218.87 679.27,221
  region net D12V0: 581.98,322.27 652.16,322.27 710.11,380.22 947.69,380.22 978.6,349.32 978.6,274.63 991.48,261.75 1204.6,261.75 1232.93,290.08 1232.93,321.63 1220.05,334.51 1196.87,334.51 1077.75,453.62 647.95,453.62 581.9,387.57
  region net D5V0: 1276.68,263.4 1399.63,263.4 1405.28,257.74 1405.28,225.24 1355.53,175.49 1285.16,175.49 1276.68,183.97
  region net D3V3: 1879.97,354.9 1606.59,354.9 1587.78,336.09 1462.8,336.09 1453.18,326.48 1453.18,313.52 1462.8,303.91 1587.78,303.91 1620.8,270.88 1880.38,270.88
  region net D12V0: 2459.2,1150.61 2513.34,1150.61 2526.4,1163.67 2575.03,1163.67 2611.1,1199.75 2735.39,1199.75 2744.71,1190.43 2744.71,1142.81 2736.65,1134.75 2516.79,1134.75 2512.04,1139.49 2459.39,1139.49
  region net D12V0: 2459.04,535.02 2513.18,535.02 2526.24,548.09 2574.87,548.09 2614.91,588.12 2724.54,588.12 2744.03,568.63 2744.03,519.16 2516.63,519.16 2511.89,523.91 2459.24,523.91
  region net D12V0: 978.6,274.63 978.6,152.56 1020.16,111 1868.35,111 1891.92,134.58 1891.92,193.07 1859.72,225.27 1437.93,225.27 1378.53,165.88 1271.11,165.88 1232.93,204.06 1232.93,305.86 1217.77,290.7 994.4,290.7
Bottom Layer:
  region net NetF1_2: 406.1,422.82 406.1,442.17 430.77,466.84 651.36,466.84 680.87,437.34 680.87,345.91 553.65,345.91 553.65,330.91 473.83,251.09 421.58,251.09 406.07,266.6 406.07,321.03
  region net D12V0: 993.35,451.35 1080.43,451.35 1132.67,399.11 1132.67,361.86 1124.45,353.63 1004.96,353.63 993.84,364.76
  region net D5V0: 902.93,451.58 902.93,306.58 862.45,266.09 862.45,124.77 1398.38,124.77 1416.97,143.37 1416.97,226.75 1410.18,233.54 1055.08,233.54 957,331.62 957,452
  region net D3V3: 1508.38,180.64 1508.38,399.28 1547.63,438.53 1547.63,499.02 1545.08,501.56 1415.33,501.56 1412.43,498.66 1412.43,441.23 1452.29,401.37 1452.29,181.65 1458.14,175.8 1498.99,175.8
  region net D12V0: 2647.24,1199.65 2738.5,1199.65 2745.82,1192.33 2745.82,298.06 2692.01,244.25 2373.09,244.25 2226.03,97.19 1785.74,97.19 1785.74,208.35 1804.51,227.13 2147.01,227.13 2243.15,323.27 2608.93,323.27 2647.24,361.57
  region net NetD1_1: 476.81,222.74 501.64,247.57 641.15,247.57 646.92,241.8 646.92,180.06 639.03,172.18 567.94,172.18 538.61,142.84 489.4,142.84 476.75,155.49
Multi-Layer:
  pour cut-out: 1579.91,1477.59 1579.91,1238.39 1582.88,1235.43 2176.54,1235.43 2177.85,1236.74 2177.85,1475.33 2173.12,1480.06 1582.34,1480.06

## Silkscreen, mask and mechanical layers (free items; w line width, h text height)
Bottom Overlay:
  text "www.sky-rover.com" at 2968.44,1074.17 h35 r90
Mechanical 2:
  drawing of 304 lines, arcs and shapes, not listed

## Dimensions
3070,0 to 3070,1575 on Top Overlay
3070,0 to 0,0 on Top Overlay
0,0 to -117.06,176.83 on Top Overlay
0,0 to -114.51,670 on Top Overlay
118,1405 to 0,1575 on Top Overlay